# Altium PCB PCB1.PcbDoc
Units mm, origin at the board's own origin, x right, y up, seen from the top; angles counter-clockwise.
Board outline 17.32 x 33.22 mm, 4 copper layers (Top Layer, GND, PWR, Bottom Layer), stack 1.586 mm thick; 31 components, 36 nets, 124 pads, 49 vias.
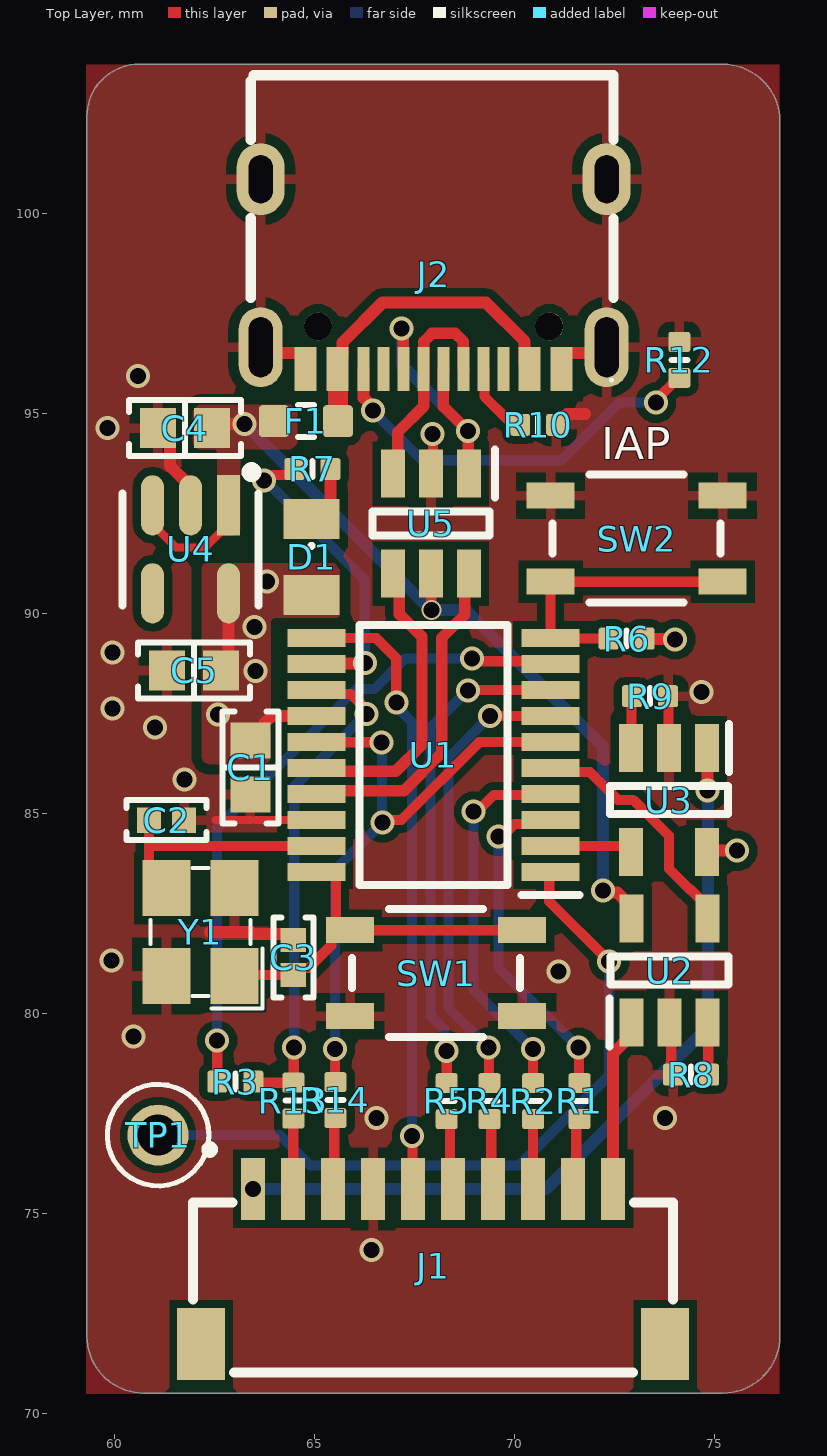
[diagram p0: Top Layer view]
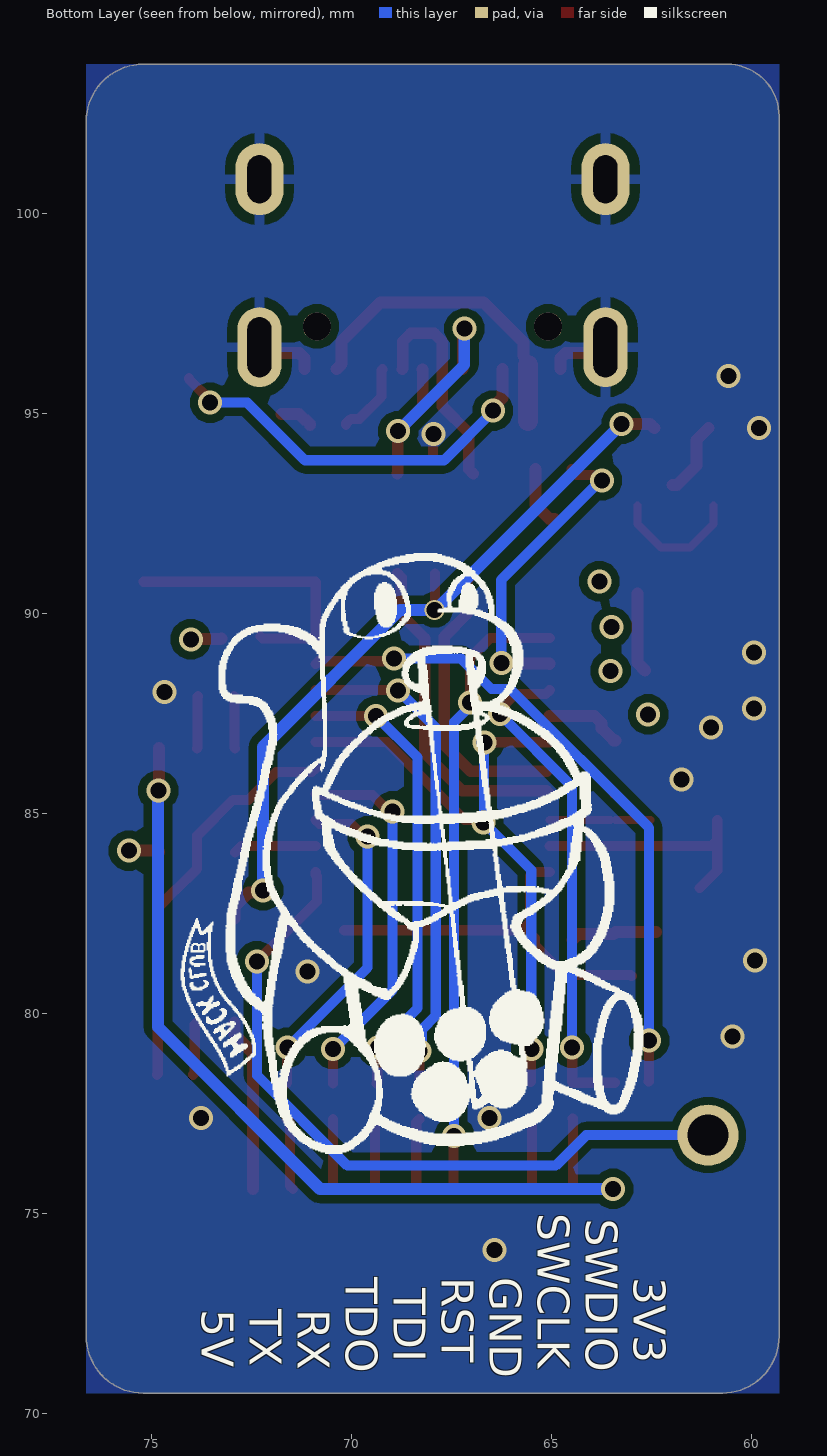
[diagram p1: Bottom Layer view, seen from below]
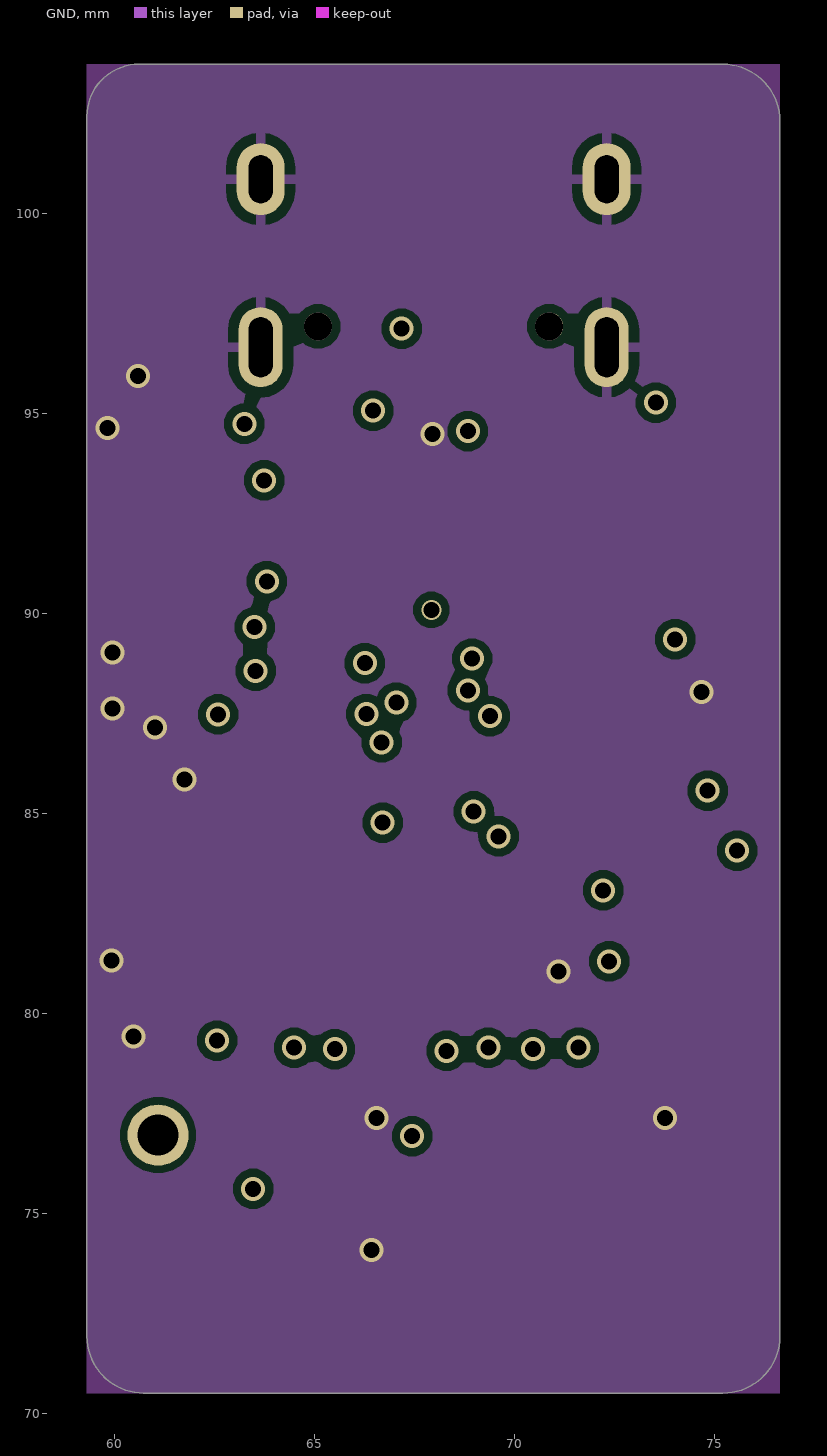
[diagram p2: GND]
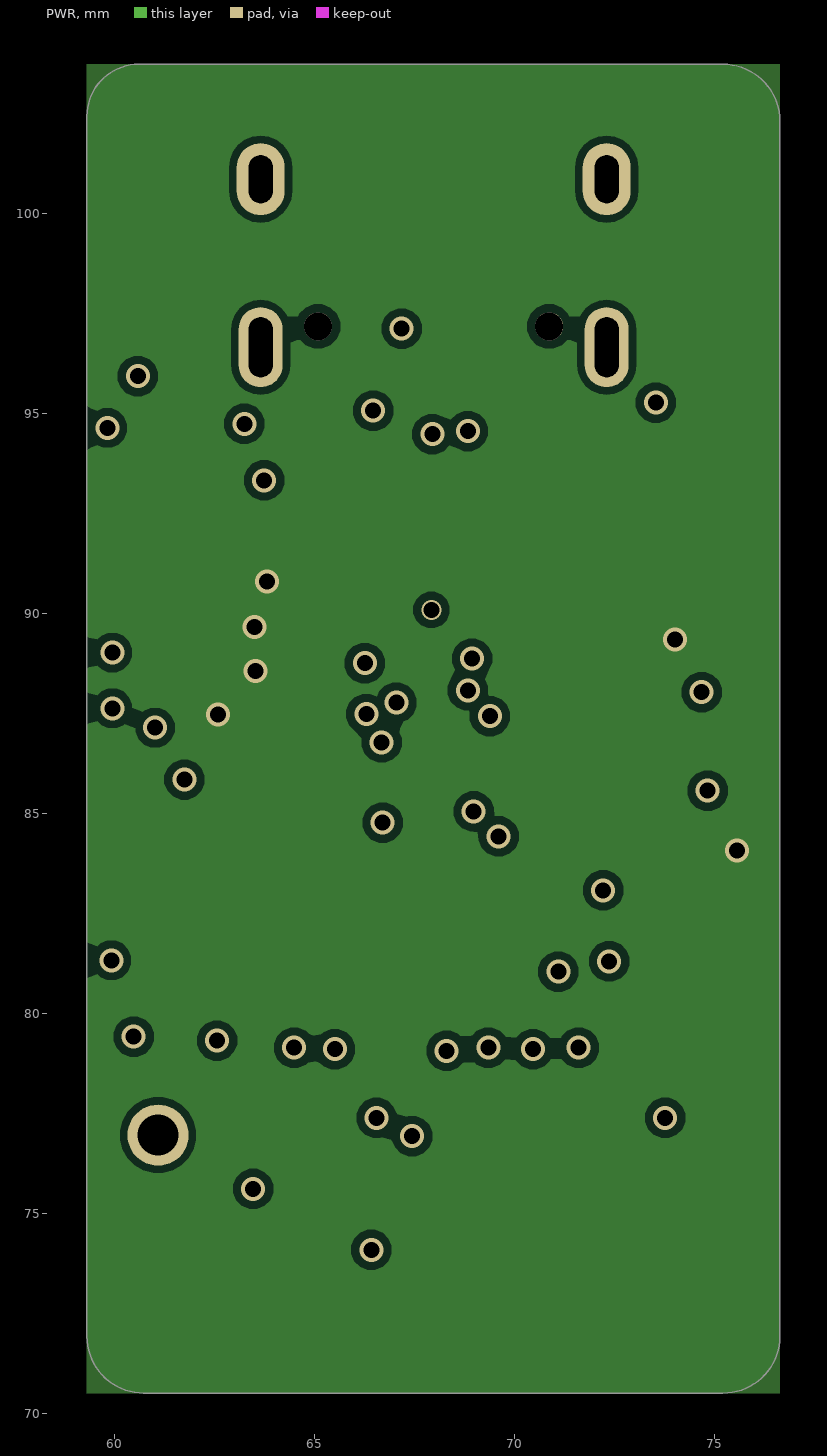
[diagram p3: PWR]
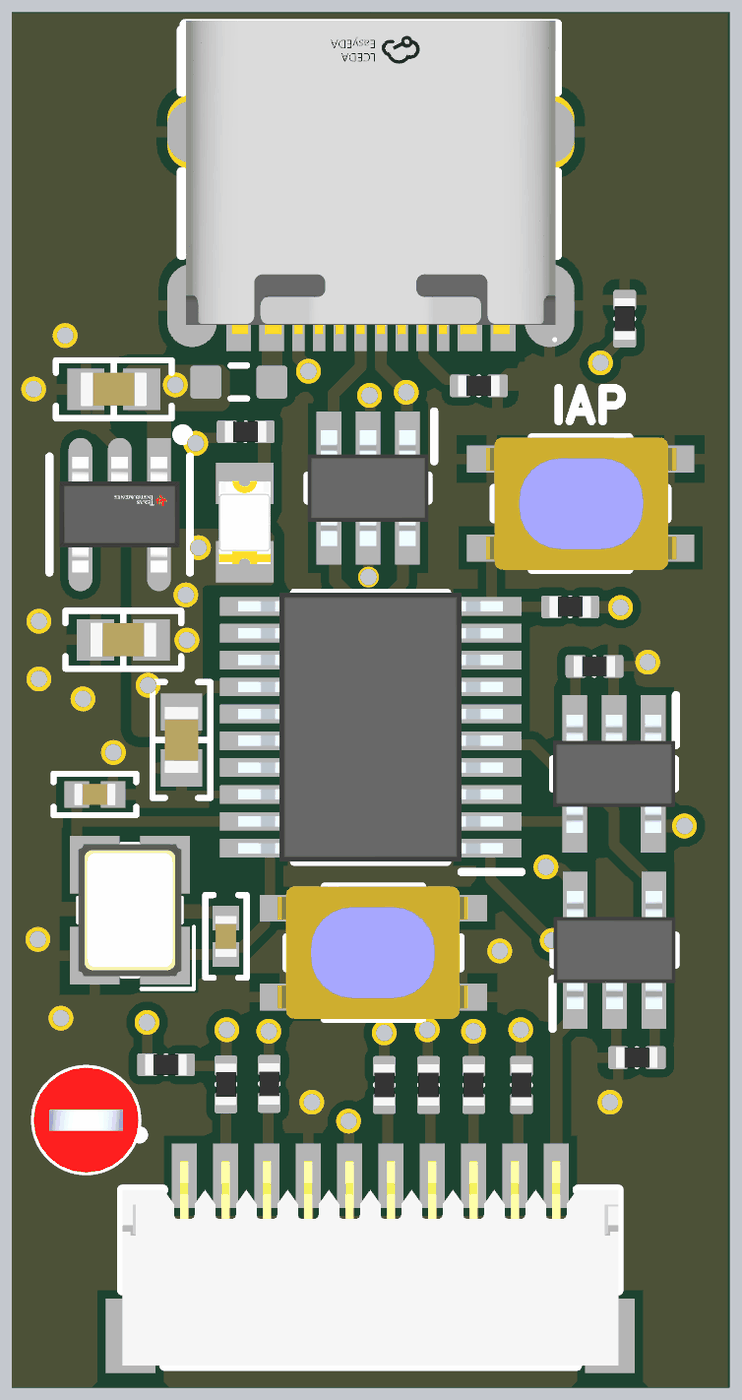
[diagram p4: 3D render of the assembled board from above, using the file's embedded part models]

## Layer stack, top to bottom
Top Solder: solder mask 0.0152, Solder Resist, Dk 3.8
Top Layer: signal copper 0.035
Dielectric 2: prepreg 0.2104, PP-022, Dk 4.5
GND: signal copper 0.0152
Dielectric 1: dielectric 1.065, FR-4, Dk 4.6
PWR: signal copper 0.0152
Dielectric 3: prepreg 0.2104, PP-022, Dk 4.5
Bottom Layer: signal copper 0.035
Bottom Solder: solder mask 0.0152, Solder Resist, Dk 3.8

## Board outline
60.731,70.51 75.209,70.51 ccw(c75.209,71.933) 76.632,71.933 76.632,102.311 ccw(c75.209,102.311) 75.209,103.734 60.604,103.734 ccw(c60.604,102.438) 59.309,102.438 59.309,71.933 ccw(c60.731,71.933)

## Design rules (kind name [scope] priority, off if disabled: settings)
Clearance [All] p1: gap=0.2 ignorepadtopadclearanceinfootprint=FALSE except(0.17: SMDPad-Hole; 0.18: SMDPad-SMDPad THPad-Fill THPad-Poly THPad-Region; 0.25: Poly-Poly)
ComponentClearance [All] p1: gap=0.15 collisioncheckmode=3 verticalgap=0.254 showdistances=FALSE
DiffPairsRouting [All] p1: maxlimit=0.203 minlimit=0.2 mostfreqgap=0.203 toplayer_mingap=0.203 toplayer_minwidth=0.287 toplayer_maxwidth=0.287 toplayer_prefwidth=0.287 midlayer1_maxgap=0.2 midlayer1_prefgap=0.2 midlayer1_minwidth=0.191 midlayer1_maxwidth=0.191 midlayer1_prefwidth=0.191 midlayer2_maxgap=0.2 midlayer2_prefgap=0.2 midlayer2_minwidth=0.191 midlayer2_maxwidth=0.191 midlayer2_prefwidth=0.191 bottomlayer_mingap=0.203 bottomlayer_minwidth=0.287 bottomlayer_maxwidth=0.287 bottomlayer_prefwidth=0.287 impedanceprofiledriven=TRUE impedanceprofileid={6874668A-1446-4BEB-B873-EEAEE851061D} impedanceprofilevalue=90.000000 maxuncoupledlength=12.7
MinimumSolderMaskSliver [All] p1: minsoldermaskwidth=0.05
PlaneConnect [All] p1: pad.planeconnectstyle=Relief pad.reliefexpansion=0.508 pad.reliefentries=4 pad.reliefconductorwidth=0.254 pad.reliefairgap=0.254 via.planeconnectstyle=Direct via.reliefexpansion=0.508 via.reliefentries=4 via.reliefconductorwidth=0.254 via.reliefairgap=0.254
PolygonConnect PolygonConnect_2 [InNet('3V3')] p1: connectstyle=Direct reliefconductorwidth=0.254 reliefentries=4 polygonreliefangle="90 Angle" airgapwidth=0.254
PolygonConnect PolygonConnect_1 [InNet('GND')] p2: thpad.connectstyle=Relief thpad.reliefconductorwidth=0.254 thpad.reliefentries=4 thpad.polygonreliefangle="90 Angle" thpad.airgapwidth=0.254 smdpad.connectstyle=Relief smdpad.reliefconductorwidth=0.254 smdpad.reliefentries=4 smdpad.polygonreliefangle="90 Angle" smdpad.airgapwidth=0.254 via.connectstyle=Direct via.reliefconductorwidth=0.254 via.reliefentries=4 via.polygonreliefangle="90 Angle" via.airgapwidth=0.254
PolygonConnect [InNet('VBUS')] p3: connectstyle=Direct reliefconductorwidth=0.254 reliefentries=4 polygonreliefangle="90 Angle" airgapwidth=0.254
RoutingVias [All] p1: holewidth=0.4 width=0.6 viastyle="Through Hole" minholewidth=0.4 minwidth=0.5 maxholewidth=0.711 maxwidth=1.27
SilkToSilkClearance [All] p1: silktosilkclearance=0.1
SilkToSolderMaskClearance [IsPad] p1: minsilkscreentomaskgap=0.1 clearancetoexposedcopper=TRUE
SolderMaskExpansion [All] p1: expansion=0 istentingtop=FALSE
SupplyNets "Schematic Supply Nets_4" [InNet('3V3')] p1: voltage=0.000
SupplyNets "Schematic Supply Nets_3" [InNet('3V3OUT')] p2: voltage=0.000
SupplyNets "Schematic Supply Nets_2" [InNet('GND')] p3: voltage=0.000
SupplyNets "Schematic Supply Nets_1" [InNet('VBUS')] p4: voltage=0.000
SupplyNets "Schematic Supply Nets" [InNet('5VOUT')] p5: voltage=0.000
Width [All] p1: maxlimit=0.5 minlimit=0.2 preferedwidth=0.254 midlayer1_minwidth=0.254 midlayer1_maxwidth=0.254 midlayer2_minwidth=0.254 midlayer2_maxwidth=0.254 minimp=50.000000 maximp=50.000000 favimp=50.000000
24 further rules are at their usual default settings.

## Classes and differential pairs
differential pair DIN: +DIN_P -DIN_N
differential pair D: +D_P -D_N

## Components (designator, comment, footprint, x,y, rotation, side; value= is the part's Value field where it differs from the comment)
C1 "Capacitors,C126631,1uF" "CAP 0603_1608" 63.395,86.154 r90 top value=1uF
C2 "Capacitors,C526980,30pF" "CAP 0402_1005" 61.298,84.836 r0 top value=30pF
C3 "Capacitors,C526980,30pF" "CAP 0402_1005" 64.47,81.404 r90 top value=30pF
C4 "Capacitors,C126631,1uF" "CAP 0603_1608" 61.756,94.635 r180 top value=1uF
C5 "Capacitors,C126631,1uF" "CAP 0603_1608" 61.987,88.579 r180 top value=1uF
D1 "KT-0805G" KT-0805G 64.924,91.422 r180 top
F1 "Fuses,500mA,C7472536" LFUS-467_V 64.782,94.81 r180 top
J1 "SM10B-SRSS-TB__LF__SN_" SM10B-SRSS-TB 61.962,75.274 r0 top
J2 "TYPE-C 16PIN 2MD(073)" USB-C-SMD_TYPE-C-16PIN-2MD-073 67.976,98.485 r180 top
R1 "Resistors,C25104,330" RESC0402(1005)_L 71.622,77.81 r90 top value=330
R2 "Resistors,C25104,330" RESC0402(1005)_L 70.466,77.81 r90 top value=330
R3 "Resistors,C11702,1k" RESC0402(1005)_L 63.02,78.3 r0 top value=1k
R4 "Resistors,C25076,100" RESC0402(1005)_L 69.372,77.81 r90 top value=100
R5 "Resistors,C25076,100" RESC0402(1005)_L 68.304,77.81 r90 top value=100
R6 "Resistors,C11702,1k" RESC0402(1005)_L 72.801,89.373 r180 top value=1k
R7 "Resistors,C11702,1k" RESC0402(1005)_L 64.947,93.61 r0 top value=1k
R8 "Resistors,C25759,16k" RESC0402(1005)_L 74.413,78.472 r0 top value=16k
R9 "Resistors,C25768,22k" RESC0402(1005)_L 73.387,87.935 r180 top value=22k
R10 "Resistors,C25905,5.1k" RESC0402(1005)_L 70.59,94.72 r180 top value=5.1k
R12 "Resistors,C25905,5.1k" RESC0402(1005)_L 74.117,96.342 r270 top value=5.1k
R13 "Resistors,C25076,100" RESC0402(1005)_L 64.47,77.826 r90 top value=100
R14 "Resistors,C25076,100" RESC0402(1005)_L 65.52,77.838 r90 top value=100
SW1 "PTS810" FP-PTS810_SJG_250_SMTR_LF-MFG 68.04,81.009 r0 top
SW2 "PTS810" FP-PTS810_SJG_250_SMTR_LF-MFG 73.05,91.872 r180 top
TP1 "5000" KEYSTONE_5000 61.087,76.962 r0 top
U1 "CH32V305FBP6" SOP65P640X110-20N 67.97,86.462 r180 top
U2 "SY6280AAC" SOT95P285X140-5N 73.873,81.072 r90 top
U3 "SY6280AAC" SOT95P285X140-5N 73.859,85.335 r270 top
U4 "TPS7A2033PDBVR" FP-DBV0005A-IPC_B 61.899,91.607 r270 top
U5 "USBLC6-2SC6" SOT95P280X145-6N 67.909,92.247 r270 top
Y1 "X322512MSB4SI" X322512MSB4SI 62.146,82.039 r90 top

## Footprints (in the part's own frame and the unit in brackets; to place one, negate y for a bottom-side part, rotate by r counter-clockwise, add the part's x,y. Pads: shape width x height; smd on the part's side, far side on the other; paste and mask are expansions set on the pad)
"CAP 0402_1005" [mm] "Chip Capacitor, 2-Leads, Body 1.02x0.51mm, IPC Medium Density"
  rect 0.6x0.64 smd: 1(-0.44,0) 2(0.44,0)
  silkscreen extent -1,-0.5 1,0.5, body extent -0.5,-0.26 0.5,0.26, height 0.52
"CAP 0603_1608" [mm] "Chip Capacitor, 2-Leads, Body 1.60x0.80mm, IPC Medium Density"
  rect 0.9x1 smd: 1(-0.675,0) 2(0.675,0)
  silkscreen extent -1.4,-0.7 1.4,0.7, body extent -0.8,-0.41 0.8,0.41, height 0.82
FP-DBV0005A-IPC_B [mm]
  rect 1.505x0.572 smd paste+0 mask+0: 1(-1.1,0.95)
  rrect100% 1.505x0.572 smd paste+0 mask+0: 2(-1.1,0) 3(-1.1,-0.95) 4(1.1,-0.95) 5(1.1,0.95)
  silkscreen extent -2.06,-1.7 1.4,1.7, body extent -2.1,-1.7 2.1,1.7, height 0.25
FP-PTS810_SJG_250_SMTR_LF-MFG [mm]
  rect 1.2x0.65 smd paste+0 mask+0: 1(-2.15,1.075) 2(2.15,1.075) 3(-2.15,-1.075) 4(2.15,-1.075)
  silkscreen extent -2.1,-1.6 2.1,1.6, body extent -2.7,-1.7 2.7,1.7, height 0.25
KEYSTONE_5000 [mm]
  round 1.53 hole 1.02: TP(0,0)
  silkscreen extent -1.27,-1.27 1.27,1.27, body extent -1.27,-1.27 1.27,1.27, height 4.57
KT-0805G [mm]
  rect 1.4x1 smd: 1(0,-0.94) 2(0,0.96)
  silkscreen extent -0.05,-0.32 0.05,-0.22, body extent -0.64,-1 0.63,1.02, height 1
LFUS-467_V [mm] "SMD, 2-Leads, Body 1.6x0.813mm"
  rrect25% 0.75x0.8 smd: 1(-0.8,0) 2(0.8,0)
  silkscreen extent -0.2,-0.4 0.2,0.4, body extent -0.8,-0.41 0.8,0.41, height 0.43
RESC0402(1005)_L [mm] "Chip Resistor, Body 1.0x0.5mm, IPC High Density"
  rrect25% 0.5x0.55 smd: 1(-0.45,0) 2(0.45,0)
  silkscreen extent 0,-0.2 0,0.2, body extent -0.5,-0.25 0.5,0.25, height 0.3
SM10B-SRSS-TB [mm]
  rect 0.6x1.55 smd: 1(1.5,0.342) 2(2.5,0.342) 3(3.5,0.342) 4(4.5,0.342) 5(5.5,0.342) 6(6.5,0.342) 7(7.5,0.342) 8(8.5,0.342) 9(9.5,0.342) 10(10.5,0.342)
  rect 1.2x1.8 smd: 11(0.2,-3.533) 12(11.8,-3.533)
  silkscreen extent 0,-4.25 12,1.41, body extent 0,-4.25 12,0.7, height 2.97
SOP65P640X110-20N [mm]
  rect 1.45x0.45 smd: 1(-2.925,2.925) 2(-2.925,2.275) 3(-2.925,1.625) 4(-2.925,0.975) 5(-2.925,0.325) 6(-2.925,-0.325) 7(-2.925,-0.975) 8(-2.925,-1.625) 9(-2.925,-2.275) 10(-2.925,-2.925) 11(2.925,-2.925) 12(2.925,-2.275) 13(2.925,-1.625) 14(2.925,-0.975) 15(2.925,-0.325) 16(2.925,0.325) 17(2.925,0.975) 18(2.925,1.625) 19(2.925,2.275) 20(2.925,2.925)
  silkscreen extent -3.65,-3.25 1.85,3.5, body extent -3.2,-3.25 3.2,3.25, height 1.1
SOT95P280X145-6N [mm]
  rect 1.2x0.6 smd: 1(-1.25,0.95) 2(-1.25,0) 3(-1.25,-0.95) 4(1.25,-0.95) 5(1.25,0) 6(1.25,0.95)
  silkscreen extent -1.85,-1.46 0.3,1.6, body extent -1.4,-1.46 1.4,1.46, height 1.45
SOT95P285X140-5N [mm]
  rect 1.2x0.6 smd: 1(-1.3,0.95) 2(-1.3,0) 3(-1.3,-0.95) 4(1.3,-0.95) 5(1.3,0.95)
  silkscreen extent -1.9,-1.48 0.35,1.5, body extent -1.43,-1.48 1.43,1.48, height 1.4
USB-C-SMD_TYPE-C-16PIN-2MD-073 [mm] "USB-C (USB TYPE-C) Receptacle Connector 16 Position Surface Mount, Right Angle"
  rect 0.55x1.1 smd: A1B12(-3.2,2.375) A4B9(-2.4,2.375) B1A12(3.2,2.375) B4A9(2.4,2.375)
  rect 0.3x1.1 smd: A5(-1.25,2.375) A6(-0.25,2.375) A7(0.25,2.375) A8(1.25,2.375) B5(1.75,2.375) B6(0.75,2.375) B7(-0.75,2.375) B8(-1.75,2.375)
  rrect100% 1.2x1.8 hole 0.6 slot 1.2 at 90 deg: S1(-4.325,-2.375) S1(4.325,-2.375)
  rrect100% 1.1x2 hole 0.6 slot 1.5 at 90 deg: S1(-4.325,1.825) S1(4.325,1.825)
  round 0.7 hole 0.7 unplated: ""(-2.89,1.305) ""(2.89,1.305)
  silkscreen extent -4.5,-4.97 4.57,2.68, body extent -4.47,-5.06 4.47,2.52, height 3.23
X322512MSB4SI [mm]
  rect 1.4x1.2 smd: 1(-1.1,-0.85) 2(1.1,-0.85) 3(1.1,0.85) 4(-1.1,0.85)
  silkscreen extent -1.91,-1.55 1.6,1.25, body extent -1.6,-1.25 1.6,1.25, height 0.7

## Part data
C1 C4 C5: library part Capacitors, "Capacitor", LCSC=C126631, Component Type=Capacitors
C2 C3: library part Capacitors, "Capacitor", LCSC=C526980, Component Type=Capacitors
D1: library part CMP-007-00006-5, "-40℃~+85℃ 100mW 120° 2.6V~3.1V 430mcd 513nm~528nm 525nm 5mA Emerald Green 0805 LED Indication - Discrete ROHS", Case/Package=0805, Colour="Emerald Green", Forward Current=5mA, Forward Voltage=2.6V, LCSC=C84256, Max Operating Temperature=85°C, Max Power Dissipation=100mW, Min Operating Temperature=-40°C, Mounting Technology=SMD, Nominal Vf=2.7V, Pins=2, RoHS Compliant=Yes
F1: library part Fuses, "Fuse", Current Rating=500mA, LCSC=C7472536, Component Type=Fuses
J1: "Connector", Arrow Part Number="SM10B-SRSS-TB (LF)(SN)", LCSC=C5340780, Manufacturer_Name="JST (JAPAN SOLDERLESS TERMINALS)", Arrow Price/Stock=https://www.arrow.com/en/products/sm10b-srss-tb-lf-sn/jst-manufacturing, Datasheet Link=https://www.jst.co.uk/downloads/series/eSR_SZ_(21-04-14).pdf, Manufacturer_Part_Number="SM10B-SRSS-TB (LF)(SN)"
J2: library part TYPE-C_16PIN_2MD_073, "USB-C (USB TYPE-C) Receptacle Connector 16 Position Surface Mount, Right Angle", LCSC=C165948
R1 R2: library part Resistors, "Resistor", LCSC=C25104, Component Type=Resistors
R3 R6 R7: library part Resistors, "Resistor", LCSC=C11702, Component Type=Resistors
R4 R5 R13 R14: library part Resistors, "Resistor", LCSC=C25076, Component Type=Resistors
R8: library part Resistors, "Resistor", LCSC=C25759, Component Type=Resistors
R9: library part Resistors, "Resistor", LCSC=C25768, Component Type=Resistors
R10 R12: library part Resistors, "Resistor", LCSC=C25905, Component Type=Resistors
SW1 SW2: library part CMP-10040-000011-1, "SWITCH TACTILE SPST-NO 0.05A 16V", Contact Resistance=500mΩ, Current Rating=50mA, LCSC=C5363473, Manufacturer="C&K Components", Manufacturer Part Number="PTS810 SJG 250 SMTR LFS", Operating Force=400gf, Temperature="-40°C to +85°C", Temperature Range High=+85°C, Temperature Range Low=-40°C, Voltage Rating Dc=16V, Automotive=No, Category=Switch, ComponentLink2Description=Datasheet, ComponentLink2URL=https://www.ckswitches.com/media/1476/pts810.pdf, Device Class L1=Electromechanical, Device Class L2=Switches, Device Class L3="Tactile Switches", Digikey Description="SWITCH TACTILE SPST-NO 0.05A 16V", Electromechanical Life=100000Cycles, Height=2.7mm, Lead Free=Yes, Mouser Description="Switch Tactile N.O. SPST Button J-Bend 0.05A 16VDC 100000Cycles 3.92N SMD T/R", Octopart=https://octopart.com/pts810sjg250smtrlfs-c%26k+components-29380277, Package="PTS810 SJG 250 SMTR LFS", RoHS=TRUE, Throw Configuration=SPST-NO
TP1: library part CMP-246-000000-1, "Test Point Miniature THM H .300 Nylon 46 Insulated Red PhosBronze/Silver", Package="Test Point Keystone Electronics", Check_prices=https://www.snapeda.com/parts/5000/Keystone+Electronics/view-part/?ref=eda, Component Type=Standard, Design Item ID=5000, MF="Keystone Electronics", MP=5000, Pin Count=1, SnapEDA_Link=https://www.snapeda.com/parts/5000/Keystone+Electronics/view-part/?ref=snap, Source=5000.SchLib
U1: "Integrated Circuit", LCSC=C5123443, Manufacturer_Name=WCH, Datasheet Link=https://lcsc.com/datasheet/lcsc_datasheet_2501141725_WCH-CH32V305FBP6_C5123443.pdf, Height=1.1mm, Manufacturer_Part_Number=CH32V305FBP6
U2 U3: "Integrated Circuit", LCSC=C55136, Manufacturer_Name="Olimex Ltd.", Manufacturer_Part_Number="SMD IC SY6280AAC", Mouser Part Number=909-SMDICSY6280AAC, Datasheet Link=https://nl.mouser.com/datasheet/2/306/SY6280AAC-3223659.pdf, Height=1.4mm, Mouser Price/Stock=https://www.mouser.co.uk/ProductDetail/Olimex-Ltd/SMD-IC-SY6280AAC?qs=9vOqFld9vZUuwGiRcx8i5w%3D%3D
U4: "IC REG LINEAR 3.3V 300MA SOT23-5", LCSC=C2862740, RoHS Compliant=Yes
U5: "Integrated Circuit", LCSC=C2827654, Manufacturer_Name=STMicroelectronics, Mouser Part Number=511-USBLC6-2SC6, Arrow Part Number=USBLC6-2SC6, Arrow Price/Stock=https://www.arrow.com/en/products/usblc6-2sc6/stmicroelectronics.html?utm_currency=USD&region=nac, Datasheet Link=https://www.st.com/resource/en/datasheet/usblc6-2.pdf, Height=1.45mm, Manufacturer_Part_Number=USBLC6-2SC6, Mouser Price/Stock=https://www.mouser.co.uk/ProductDetail/STMicroelectronics/USBLC6-2SC6?qs=po45yt2pPpu%2FhNIlwQdTlg%3D%3D
Y1: "Crystal or Oscillator", LCSC=C9002, Manufacturer_Name="Yangxing Tech", Datasheet Link=https://datasheet.lcsc.com/szlcsc/Yangxing-Tech-X322512MSB4SI_C9002.pdf, Height=0.8mm, Manufacturer_Part_Number=X322512MSB4SI

## Via types
v1: diameter 0.6, hole 0.4, Top Layer to Bottom Layer, 48 vias
v2: diameter 0.5, hole 0.4, Top Layer to Bottom Layer, 1 vias

## Nets (pads, with @x,y where several pads share a name; then routed paths per layer and width w, separated by ;. In a path a pad name is that pad's centre, name@x,y a point inside that pad or via, vN(x,y) a via of type N, cw(c..) or ccw(c..) an arc to the next point about the centre after c; other vN are vias at no path point)
3V3: C1.2 C5.1 D1.2 R6.1 U1.14 U3.5 U4.5 | length 5.5
  Top Layer w0.3: C5.1 62.849,88.766 U4.5 ; C1.2 63.445,86.829 63.745,87.129 63.745,87.261 63.921,87.437 U1.14 ; R6.1 73.259,89.365 74.007,89.365 v1(74.016,89.357) ; U3.5 74.848,84.074 v1(75.565,84.074)
  other v1: 62.586,87.478 63.525,88.57 63.5,89.662 63.805,90.805
3V3_EN: U1.2 U3.4 | length 2.1
  Top Layer w0.254: U1.2 72.757,84.187 U3.4
3V3OUT: J1.1 U3.1 | length 20
  Top Layer w0.3: U3.1 74.819,86.625 74.819,85.582 v1(74.828,85.573)
  Bottom Layer w0.3: v1@63.5,75.565 63.551,75.616 70.79,75.616 74.834,79.66 74.834,85.567 v1(74.828,85.573)
  other v1: 63.462,75.616
5V_EN: U1.5 U2.4 | length 6.1
  Top Layer w0.254: U1.5 70.993,86.039 71.881,86.039 72.575,85.344 72.962,85.344 73.859,84.447 73.859,83.622 74.374,83.108 74.388,83.108 74.823,82.672 U2.4
5VOUT: J1.10 U2.1 | length 4.3
  Top Layer w0.3: J1.10 72.462,79.011 72.923,79.472 U2.1
D_N: U1.16 U5.4 | length 7.5
  Top Layer w0.287: U1.16 65.125,86.057 67.026,86.057 67.685,86.716 67.685,89.418 67.116,89.987 67.116,90.841 U5.4
D_P: U1.17 U5.6 | length 8.3
  Top Layer w0.287: U1.17 65.125,85.566 67.229,85.566 68.175,86.513 68.175,89.389 68.753,89.967 68.753,90.891 U5.6
DIN_N: J2.A7 J2.B7 U5.3 | length 5.5
  Top Layer w0.287: U5.3 67.075,93.613 67.075,94.528 67.731,95.184 67.731,96.109 67.729,96.11 67.732,96.113 67.732,96.772 67.733,96.803 67.934,97.004 68.519,97.004 68.72,96.803 68.72,96.117 J2.B7
DIN_P: J2.A6 J2.B6 U5.1 | length 7.2
  Top Layer w0.287: J2.B6 67.22,96.117 67.22,97.082 v1(67.176,97.126) v1@67.261,97.126 ; J2.A6 68.221,96.105 68.221,95.177 68.847,94.551 68.847,93.51 U5.1
  Bottom Layer w0.287: v1(67.176,97.126) 67.176,96.222 v1(68.834,94.564)
GND: C1.1 C2.2 C3.2 C4.2 C5.2 J1.4 J2.A1B12 J2.B1A12 J2.S1 R8.1 R9.1 R10.1 R12.1 SW1.3 SW1.4 SW2.3 SW2.4 U1.18 U2.2 U3.2 U4.2 U5.2 Y1.2 Y1.4 | length 13.1
  Top Layer w0.2: 62.525,84.836 63.4,84.836 ; C1.1 C1.1@63.445,85.479 ; 63.526,84.837 U1.18
  Top Layer w0.254: v1(67.945,94.488) 67.96,94.473 U5.2@67.96,94.005 ; R9.1 73.848,87.924 73.848,86.646 U3.2 ; U2.2 73.918,79.728 73.918,78.517 R8.1
  Top Layer w0.3: C4.2 61.381,94.335 61.381,93.698 61.861,93.218 U4.2@61.976,93.218 ; 62.382,82.042 62.386,82.039 63.396,82.039 63.446,81.989 64.326,81.989 C3.2 ; J2.S1@63.754,96.52 63.764,96.51 64.651,96.51 64.776,96.385 J2.B1A12 ; R10.1 71.04,94.745 71.14,94.845 71.165,94.845 71.316,94.996 71.755,94.996 ; J2.A1B12 71.176,96.385 71.301,96.51 71.936,96.51 J2.S1@72.063,96.637
  other v1: 66.421,74.092 66.548,77.394 73.762,77.394 60.477,79.426 71.095,81.051 59.919,81.331 61.747,85.852 61.011,87.147 59.944,87.63 74.676,88.036 59.944,89.027 59.817,94.64 60.579,95.936
IAP: R6.2 SW2.1 SW2.2 U1.10 | length 7
  Top Layer w0.254: U1.10@70.895,89.432 70.895,90.792 SW2.2 SW2.1 ; U1.10@70.94,89.432 70.992,89.38 72.228,89.38 72.275,89.428 R6.2@72.275,89.432
NetC2_1: C2.1 U1.19 Y1.3 | length 6.1
  Top Layer w0.254: C2.1 60.858,84.336 ; Y1.3 60.858,83.576 60.858,84.336 ; U1.19 61.008,84.187 60.858,84.336
NetC3_1: C3.1 SW1.1 SW1.2 U1.20 Y1.1 | length 9.5
  Top Layer w0.254: Y1.1 63.022,80.964 C3.1 64.643,81.137 64.846,81.137 65.417,81.709 65.417,81.886 SW1.1@65.615,82.084 ; U1.20 65.434,83.537 65.532,83.439 65.532,82.282 SW1.1@65.73,82.084 ; SW1.1 SW1.2
NetD1_1: D1.1 R7.2 | length 1.5
  Top Layer w0.3: D1.1 65.047,92.362 65.397,92.712 R7.2
NetF1_1: F1.1 J2.A4B9 J2.B4A9 | length 7.9
  Top Layer w0.3: J2.B4A9@65.659,96.393 65.701,96.435 65.701,96.78 66.697,97.776 69.28,97.776 70.251,96.805 70.251,96.235 J2.A4B9
  Top Layer w0.5: F1.1 J2.B4A9@65.582,96.216
NetJ1_2: J1.2 R13.1 | length 1.8
  Top Layer w0.254: J1.2 64.466,75.619 64.466,77.372 R13.1
NetJ1_3: J1.3 R14.1 | length 1.8
  Top Layer w0.254: J1.3 65.491,75.644 65.491,77.36 R14.1
NetJ2_A5: J2.A5 R10.2 | length 1.9
  Top Layer w0.254: J2.A5 69.249,96.087 69.249,95.425 69.805,94.868 70.017,94.868 70.14,94.745 R10.2
NetJ2_B5: J2.B5 R12.2 | length 10.2
  Top Layer w0.254: v1(73.533,95.275) 73.533,95.333 74.066,95.866 R12.2@74.066,95.885
  Top Layer w0.3: J2.B5 66.226,95.394 66.466,95.154 v1(66.466,95.072)
  Bottom Layer w0.254: v1(66.466,95.072) 66.466,95.055 67.685,93.836 71.167,93.836 72.607,95.275 v1(73.533,95.275)
NetR1_2: R1.2 U1.3 | length 8.5
  Top Layer w0.254: v1(69.599,84.429) 69.693,84.429 70.003,84.739 70.797,84.739 U1.3 ; v1(71.603,79.146) 71.612,79.137 71.612,78.269 R1.2
  Bottom Layer w0.254: v1(69.599,84.429) 69.599,81.15 v1(71.603,79.146)
NetR2_2: R2.2 U1.4 | length 9.5
  Top Layer w0.254: v1(68.975,85.053) 69.068,85.053 69.482,85.466 70.875,85.466 U1.4 ; v1(70.46,79.109) 70.463,79.106 70.463,78.263 R2.2
  Bottom Layer w0.254: v1(68.975,85.053) 68.972,85.051 68.972,80.596 v1(70.46,79.109)
NetR3_1: R3.1 U1.9 | length 16.5
  Top Layer w0.254: v1(62.56,79.324) 62.565,79.319 62.565,78.305 R3.1 ; v1(68.936,88.875) 69.002,88.808 70.824,88.808 U1.9
  Bottom Layer w0.254: v1(62.56,79.324) 62.56,84.644 66.033,88.117 66.499,88.117 67.257,88.875 v1(68.936,88.875)
NetR4_2: R4.2 U1.7 | length 11.5
  Top Layer w0.254: v1(69.342,79.146) 69.357,79.131 69.357,78.275 R4.2 ; v1(69.383,87.437) U1.7
  Bottom Layer w0.254: v1(69.342,79.146) 68.348,80.141 68.348,86.401 v1(69.383,87.437)
NetR5_2: R5.2 U1.8 | length 12.4
  Top Layer w0.254: v1(68.301,79.07) 68.302,79.069 R5.2 R5.2 ; v1(68.834,88.081) 68.839,88.087 U1.8
  Bottom Layer w0.254: v1(68.301,79.07) 68.234,79.136 68.234,79.612 67.894,79.953 67.894,87.146 68.829,88.081 v1(68.834,88.081)
NetR8_2: R8.2 U2.3 | length 1.3
  Top Layer w0.254: U2.3 74.843,79.753 74.843,78.492 R8.2
NetR9_2: R9.2 U3.3 | length 1.3
  Top Layer w0.254: U3.3 72.923,86.649 72.923,87.921 R9.2
NRST: TP1.TP U1.1 | length 18
  Top Layer w0.254: U1.1 70.895,83.468 70.866,83.439 70.866,82.804 v1(72.365,81.305)
  Bottom Layer w0.254: TP1.TP@61.341,77.089 61.468,76.962 64.135,76.962 64.897,76.2 70.104,76.2 72.365,78.461 v1(72.365,81.305)
PC9: R7.1 U1.12 | length 7.7
  Top Layer w0.254: v1(63.739,93.33) 63.833,93.33 63.965,93.462 64.374,93.462 64.497,93.585 R7.1
  Top Layer w0.3: U1.12 65.057,88.748 66.244,88.748 v1(66.255,88.76)
  Bottom Layer w0.254: v1(63.739,93.33) 63.769,93.33 66.255,90.844 v1(66.255,88.76)
RST_EXT: J1.5 U1.11 | length 15.6
  Top Layer w0.254: U1.11 66.542,89.387 67.041,88.887 v1(67.041,87.772) ; v1(67.437,76.937) 67.45,76.924 67.45,75.629 J1.5
  Bottom Layer w0.254: v1(67.041,87.772) 67.041,87.679 67.437,87.283 v1(67.437,76.937)
RX: J1.8 R2.1 | length 1.7
  Top Layer w0.254: J1.8 70.464,75.617 70.464,77.358 R2.1
SWCLK: R14.2 U1.6 U1.15 | length 15.6
  Top Layer w0.254: U1.15 65.049,86.783 66.672,86.783 v1(66.675,86.78) ; v1(65.507,79.109) 65.513,79.103 65.513,78.295 R14.2 ; v1(66.7,84.774) 66.767,84.84 67.168,84.84 69.115,86.787 U1.6
  Bottom Layer w0.254: v1(65.507,79.109) 65.507,83.591 66.689,84.774 v1(66.7,84.774) ; v1@66.675,84.836 66.688,84.849 66.688,86.768 v1(66.675,86.78)
SWDIO: R3.2 R13.2 U1.13 | length 12.6
  Top Layer w0.254: R3.2@63.417,78.27 63.419,78.273 64.467,78.273 64.48,78.286 64.48,79.136 v1(64.491,79.146) ; U1.13 65.143,87.989 65.906,87.989 66.227,87.668 66.227,87.556 v1(66.293,87.49)
  Bottom Layer w0.254: v1(64.491,79.146) 64.491,85.687 v1(66.293,87.49)
TDI: J1.6 R5.1 | length 1.8
  Top Layer w0.254: R5.1 68.383,77.28 68.383,75.695 J1.6
TDO: J1.7 R4.1 | length 1.8
  Top Layer w0.254: R4.1 69.417,77.314 69.417,75.661 J1.7
TX: J1.9 R1.1 | length 1.8
  Top Layer w0.254: J1.9 71.542,75.695 71.542,77.28 R1.1
VBUS: C4.1 F1.2 U2.5 U4.1 U4.3 U5.5 | length 22.2
  Top Layer w0.2: U4.3 60.949,92.241 61.535,91.655 62.263,91.655 62.849,92.241 U4.1
  Top Layer w0.254: U5.5 67.914,90.992 67.914,90.099 v2(67.92,90.094)
  Top Layer w0.3: C4.1 62.538,94.742 v1(63.246,94.742) ; v1(72.212,83.083) 72.27,83.026 72.57,83.026 72.923,82.672 U2.5
  Bottom Layer w0.3: v1(63.246,94.742) 67.894,90.094 68.783,90.094 72.212,86.665 v1(72.212,83.083)
pads on no net: J1.11 J1.12 J2. J2.A8 J2.B8 U4.4

## Polygon pours and split planes (outlines as drawn)
GND on Top Layer "GND_L01_P006" (solid, pour order 6): 59.292,103.726 76.614,103.726 76.614,70.502 59.292,70.502
VBUS on Top Layer "VBUS_L01_P004" (solid, pour order 4): 63.068,91.948 62.713,91.948 cw(c62.713,92.1) 62.56,92.1 62.56,94.031 ccw(c62.484,94.031) 62.484,94.107 62.078,94.107 cw(c62.078,94.234) 61.951,94.234 61.951,95.123 cw(c62.052,95.123) 62.052,95.225 64.465,95.225 cw(c64.465,95.123) 64.567,95.123 64.567,94.234 cw(c64.44,94.234) 64.44,94.107 63.221,94.107 63.144,94.031 63.144,92.024 cw(c63.069,92.024)
3V3 on Top Layer "3V3_L01_P005" (solid, pour order 5): 65.456,91.262 cw(c65.456,91.084) 65.634,91.084 65.634,89.992 cw(c65.532,89.992) 65.532,89.891 64.008,89.891 ccw(c64.008,89.789) 63.906,89.789 63.906,86.309 cw(c63.83,86.309) 63.83,86.233 62.255,86.233 cw(c62.255,86.309) 62.179,86.309 62.179,91.135 cw(c62.306,91.135) 62.306,91.262 62.484,91.262
GND on GND "GND_L02_P007" (solid, pour order 7): 59.309,103.734 76.632,103.734 76.632,70.51 59.309,70.51
3V3 on PWR "3V3_L03_P008" (solid, pour order 8): 59.309,103.734 76.632,103.734 76.632,70.51 59.309,70.51
GND on Bottom Layer "GND_L04_P009" (solid, pour order 9): 59.309,103.734 76.632,103.734 76.632,70.51 59.309,70.51

## Silkscreen, mask and mechanical layers (free items; w line width, h text height)
Top Overlay:
  text "IAP" at 72.161,93.853 h0.8
Bottom Overlay:
  drawing of 12 lines, arcs and shapes, not listed
  text "SWCLK" at 65.339,75.004 h0.8 r90
  text "SWDIO" at 64.139,74.871 h0.8 r90
  text "3V3" at 62.939,73.405 h0.8 r90
  text "GND" at 66.54,73.405 h0.8 r90
  text "RST" at 67.74,73.405 h0.8 r90
  text "TDO" at 70.14,73.405 h0.8 r90
  text "TDI" at 68.94,73.138 h0.8 r90
  text "RX" at 71.34,72.605 h0.8 r90
  text "TX" at 72.541,72.605 h0.8 r90
  text "5V" at 73.741,72.605 h0.8 r90